# Altium PCB PCB3.PcbDoc
Units mil, origin at the board's own origin, x right, y up, seen from the top; angles counter-clockwise.
Board outline 2575 x 2875 mil, 2 copper layers (Top Layer, Bottom Layer); 10 components, 15 nets, 62 pads, 0 vias.
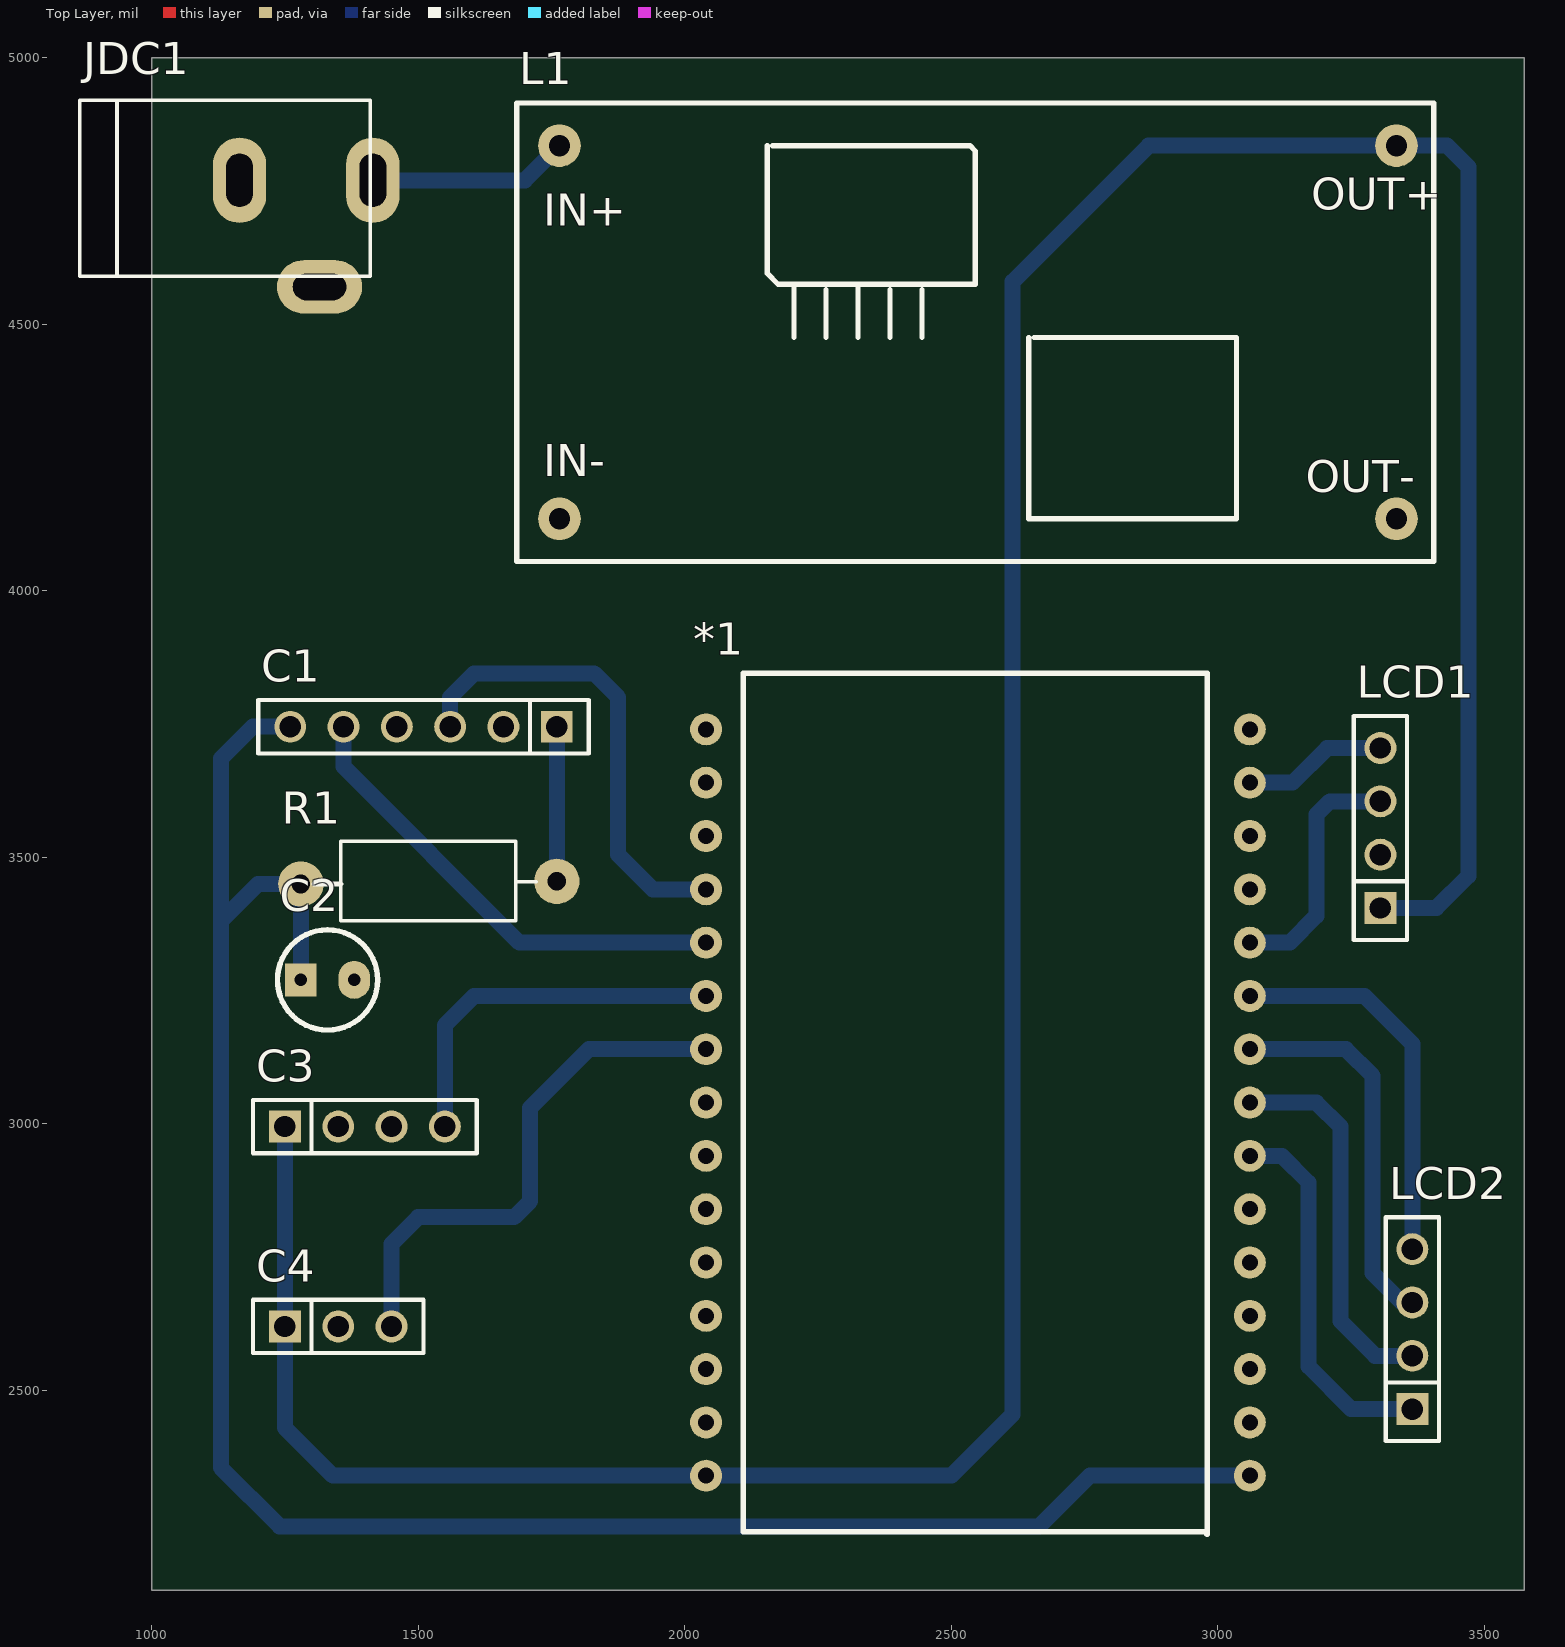
[diagram p0: Top Layer view]
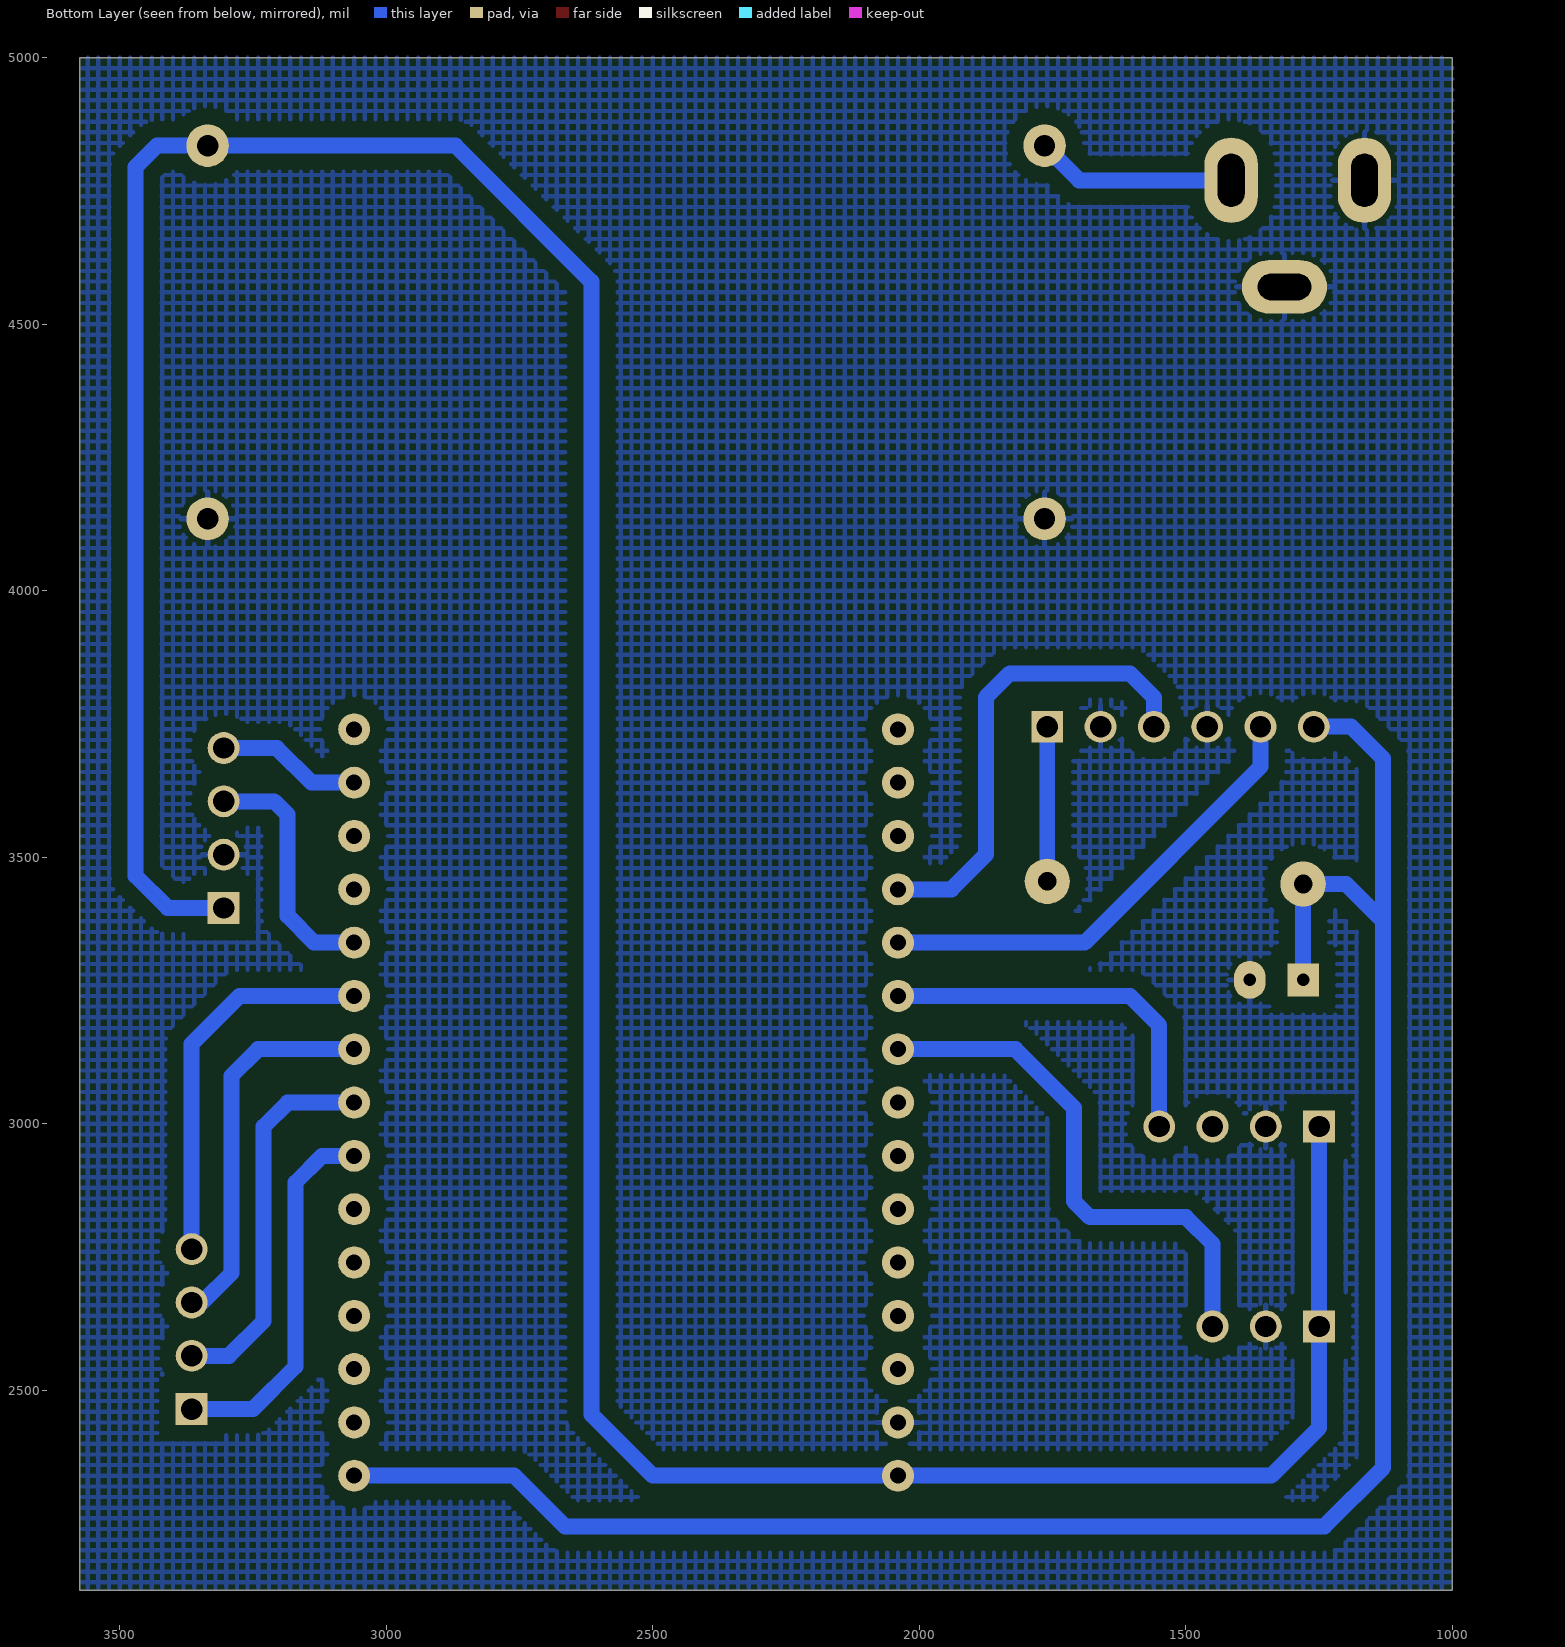
[diagram p1: Bottom Layer view, seen from below]
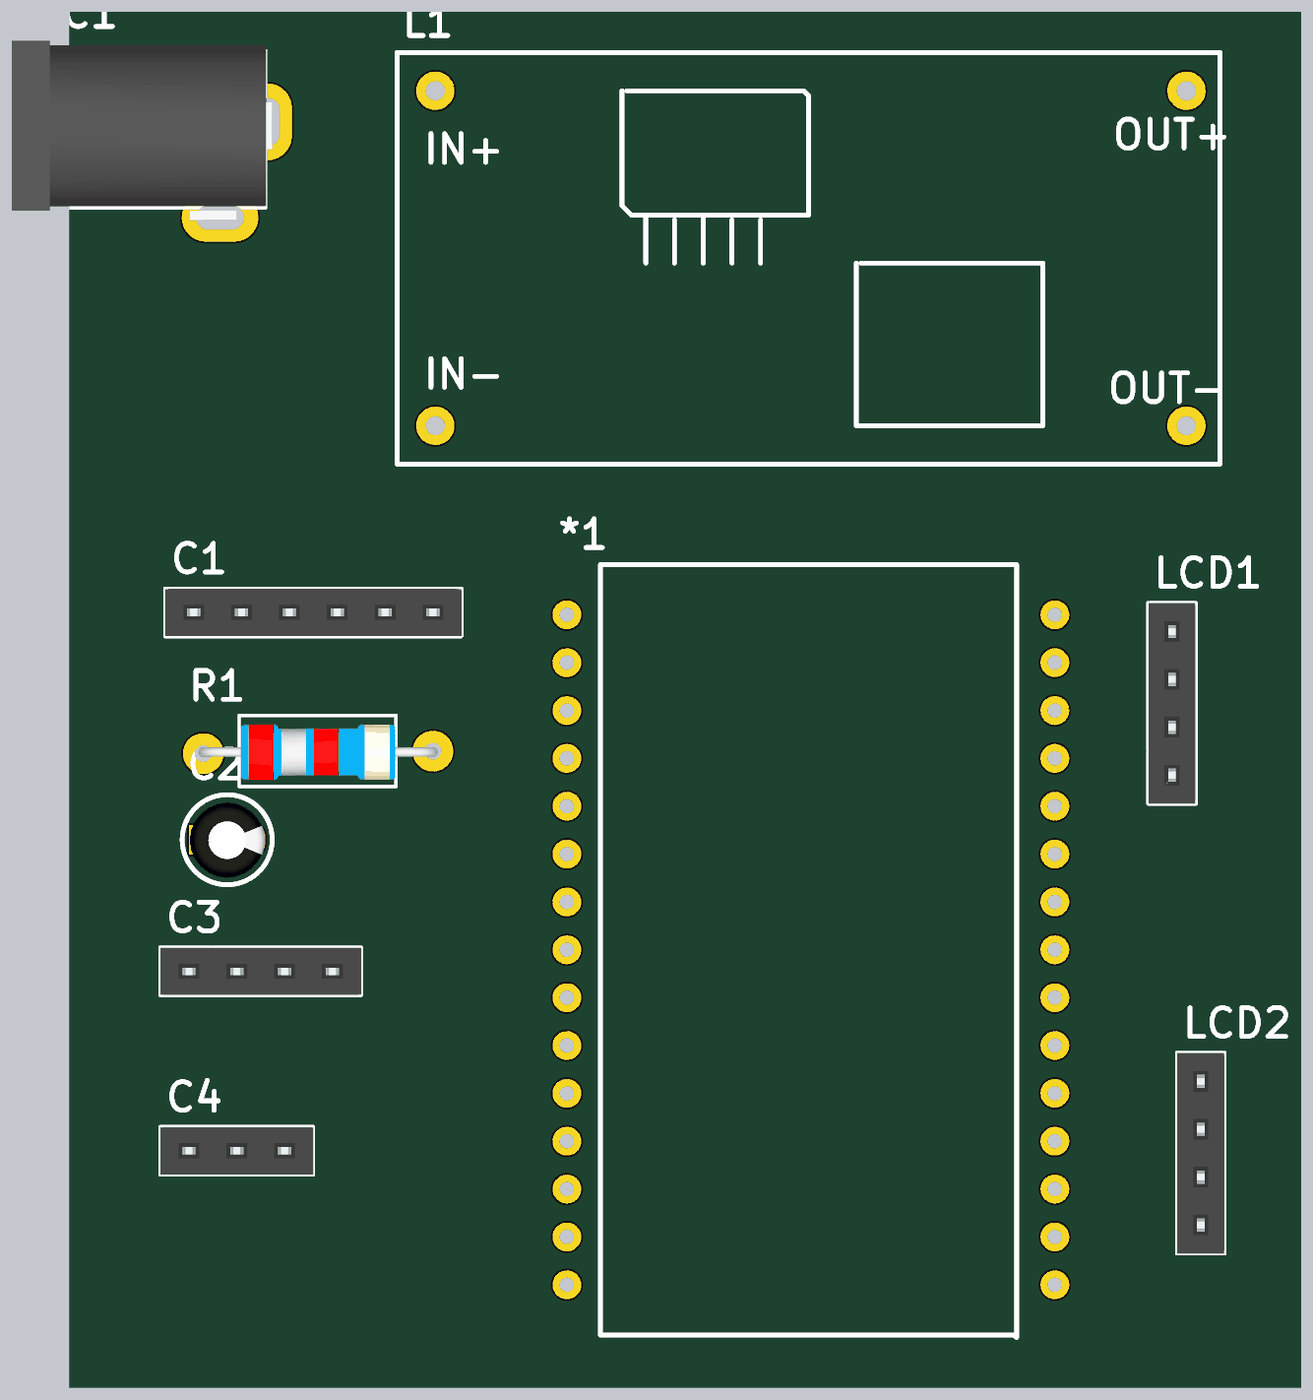
[diagram p2: 3D render of the assembled board from above, using the file's embedded part models]

## Layer stack, top to bottom
Top Solder: solder mask 0.4, Solder Resist, Dk 3.5
Top Layer: signal copper 1.4
Dielectric 1: dielectric 12.6, FR-4, Dk 4.8
Bottom Layer: signal copper 1.4
Bottom Solder: solder mask 0.4, Solder Resist, Dk 3.5

## Board outline
1000,2125 1000,5000 3575,5000 3575,2125

## Design rules (kind name [scope] priority, off if disabled: settings)
Clearance [All] p1: gap=30
PolygonConnect [All] p1: connectstyle=Relief reliefconductorwidth=10 reliefentries=4 polygonreliefangle="90 Angle" airgapwidth=10
RoutingVias [All] p1: holewidth=28 width=50 viastyle="Through Hole" minholewidth=28 minwidth=50 maxholewidth=28 maxwidth=50
SolderMaskExpansion [All] p1: expansion=4
Width [All] p1: maxlimit=30 minlimit=10 preferedwidth=20
30 further rules are at their usual default settings.

## Components (designator, comment, footprint, x,y, rotation, side; value= is the part's Value field where it differs from the comment)
*1 "Component_1" PCBComponent_1 2565,3020 r270 top
C1 "JP6" JP6-C1T 1760,3745 r180 top
C2 "CN-ALU-DIP" CA-ALU-2.54 1330,3270 r0 top
C3 "JP4" JP4-C1T 1250,2995 r0 top
C4 "JP3" JP3-C1T 1250,2620 r0 top
JDC1 "Jac DC" DC0 1290,4670 r0 top
L1 "BUCK_LM2596" BUCK_LM2596 2535,4515 r0 top
LCD1 "JP4" JP4-C1T 3305,3405 r90 top
LCD2 "JP4" JP4-C1T 3365,2465 r90 top
R1 "Res" RES-1/2W 1500,3455 r0 top

## Footprints (in the part's own frame and the unit in brackets; to place one, negate y for a bottom-side part, rotate by r counter-clockwise, add the part's x,y. Pads: shape width x height; smd on the part's side, far side on the other; paste and mask are expansions set on the pad)
BUCK_LM2596 [mil]
  round 80 hole 40: 1(-770,320) 2(-770,-380) 3(800,-380) 4(800,320)
  silkscreen extent -850,-460 870,400
CA-ALU-2.54 [mm]
  rect 1.5x1.58 hole 0.6: 1(-1.27,0)
  oval 1.5x1.8 hole 0.6: 2(1.27,0)
  silkscreen extent -2.39,-2.39 2.39,2.39, body extent -2,-2.03 1.99,1.97, height 7.01
DC0 [mil] "Jac DC input"
  oval 100x160 hole 50 slot 100 at 90 deg: 1(125,100) 2(-125,100)
  oval 160x100 hole 50 slot 100 at 0 deg: 3(25,-100)
  silkscreen extent -425,-80 120,250, body extent -410,-105 134,269, height 434
JP3-C1T [mm] "3 row, straight, gold plating"
  rect 1.52x1.52 hole 1.02: 1(0,0)
  round 1.52 hole 1.02: 2(2.54,0) 3(5.08,0)
  silkscreen extent -1.52,-1.27 6.6,1.27, body extent -1.52,-1.25 6.6,1.25, height 8.51
JP4-C1T [mm] "4 row, straight, gold plating"
  rect 1.52x1.52 hole 1.02: 1(0,0)
  round 1.52 hole 1.02: 2(2.54,0) 3(5.08,0) 4(7.62,0)
  silkscreen extent -1.52,-1.27 9.14,1.27, body extent -1.52,-1.25 9.14,1.25, height 8.51
JP6-C1T [mm] "6 row, straight, gold plating"
  rect 1.52x1.52 hole 1.02: 1(0,0)
  round 1.52 hole 1.02: 2(2.54,0) 3(5.08,0) 4(7.62,0) 5(10.16,0) 6(12.7,0)
  silkscreen extent -1.52,-1.27 14.22,1.27, body extent -1.52,-1.25 14.22,1.25, height 8.51
PCBComponent_1 [mil]
  round 60 hole 30: 0(-720,-525) 1(-620,-525) 2(-520,-525) 3(-420,-525) 4(-320,-525) 5(-220,-525) 6(-120,-525) 7(-20,-525) 8(80,-525) 9(180,-525) 10(280,-525) 11(380,-525) 12(480,-525) 13(580,-525) 14(680,-525) 15(-720,495) 16(-620,495) 17(-520,495) 18(-420,495) 19(-320,495) 20(-220,495) 21(-120,495) 22(-20,495) 23(80,495) 24(180,495) 25(280,495) 26(380,495) 27(480,495) 28(580,495) 29(680,495)
  silkscreen extent -825,-455 790,415
RES-1/2W [mil]
  round 85 hole 35: 1(-220,-5) 2(260,0)
  silkscreen extent -195,-74 221,75, body extent -230,-60 270,56, height 121

## Part data
C1 C3 C4 LCD1 LCD2: "WR-PHD 2.54 mm Angled Socket Header"
C2: "Capacitor (Semiconductor SIM Model)"
JDC1: library part DCIN, "Jac DC input"

## Nets (pads, with @x,y where several pads share a name; then routed paths per layer and width w, separated by ;. In a path a pad name is that pad's centre, name@x,y a point inside that pad or via, vN(x,y) a via of type N, cw(c..) or ccw(c..) an arc to the next point about the centre after c; other vN are vias at no path point)
3.3V: C1.6 C2.1 R1.1 | length 3860.8
  Bottom Layer w30: C1.6 1190,3745 1130,3685 1130,3380 ; C2.1@1285,3270 1280,3275 R1.1 1200,3450 1130,3380 ; 3060,2340 2760,2340 2665,2245 1240,2245 1130,2355 1130,3380
DHT11: C4.3 | length 998.7
  Bottom Layer w30: C4.3 1450,2775 1500,2825 1680,2825 1710,2855 1710,3030 1820,3140 2040,3140
GAS: C3.4 | length 702.8
  Bottom Layer w30: C3.4 1550,3185 1605,3240 2040,3240
GND: *1.13 C1.2 C1.4 C2.2 C3.2 C4.2 JDC1.2 JDC1.3 L1.2 L1.3 LCD1.2
IN_1: *1.23 LCD2.1 | length 703.9
  Bottom Layer w30: *1.23 3120.15,2940 3170.08,2890.07 3170.08,2684.19 3170.15,2684.12 3170.15,2544.85 3250,2465 LCD2.1
IN_2: *1.22 LCD2.2 | length 715.5
  Bottom Layer w30: *1.22 3185,3040 3230.15,2994.85 3230.15,2820.95 3230.08,2820.89 3230.08,2709.11 3230.15,2709.05 3230.15,2630 3295.15,2565 LCD2.2
IN_3: *1.21 LCD2.3 | length 718.5
  Bottom Layer w30: *1.21 3240,3140 3290.15,3089.85 3290.15,2796.1 3290.08,2796.03 3290.08,2733.97 3290.15,2733.9 3290.15,2719.93 3345.08,2665 LCD2.3
IN_4: *1.20 LCD2.4 | length 727.3
  Bottom Layer w30: *1.20 3275,3240 3365,3150 LCD2.4
LED_BUI: C1.3 | length 894.2
  Bottom Layer w30: C1.3 1560,3800 1605,3845 1830,3845 1875,3800 1875,3505 1940,3440 2040,3440
NetC1_1: C1.1 R1.2 | length 290
  Bottom Layer w30: R1.2 C1.1
NetJDC1_1: JDC1.1 L1.1 | length 376.9
  Bottom Layer w30: JDC1.1 1700,4770 L1.1
SCL: *1.16 LCD1.4 | length 271.9
  Bottom Layer w30: *1.16 3140,3640 3205,3705 LCD1.4
SDA: *1.19 LCD1.3 | length 466.1
  Bottom Layer w30: *1.19 3135,3340 3185,3390 3185,3580 3210,3605 LCD1.3
VCC: C3.1 C4.1 L1.4 LCD1.1 | length 6637
  Bottom Layer w30: C3.1 C4.1 1250,2430 1340,2340 2500,2340 2615,2455 2615,4580 2870,4835 L1.4 3430,4835 3470,4795 3470,3465 3410,3405 LCD1.1
VO_BUI: C1.5 | length 891.7
  Bottom Layer w30: C1.5 1360,3670 1690,3340 2040,3340
pads on no net: *1.0 *1.1 *1.2 *1.3 *1.4 *1.5 *1.6 *1.7 *1.8 *1.9 *1.10 *1.11 *1.12 *1.14 *1.15 *1.17 *1.18 *1.24 *1.25 *1.26 *1.27 *1.28 *1.29 C3.3

## Polygon pours and split planes (outlines as drawn)
GND on Bottom Layer "Bottom Layer-No Net" (hatched 90Degree grid 20 track 8, remove dead copper, pour order 0): 1000,5000 3570,5000 3570,2125 3565,2130 1005,2130

## Silkscreen, mask and mechanical layers (free items; w line width, h text height)
Mechanical 1:
  the board outline again, w10

## Text inside footprints (layer, text, board x,y; h text height)
L1: Top Overlay "IN+" at 1735,4685 h60; Top Overlay "IN-" at 1735,4215 h60; Top Overlay "OUT+" at 3175,4715 h60; Top Overlay "OUT-" at 3165,4185 h60